# Altium PCB PCB_Project_Wavelength.PcbDoc
Units mil, origin at the board's own origin, x right, y up, seen from the top; angles counter-clockwise.
Board outline 3000 x 1980 mil, 2 copper layers (Top Layer, Bottom Layer); 53 components, 31 nets, 145 pads, 41 vias.
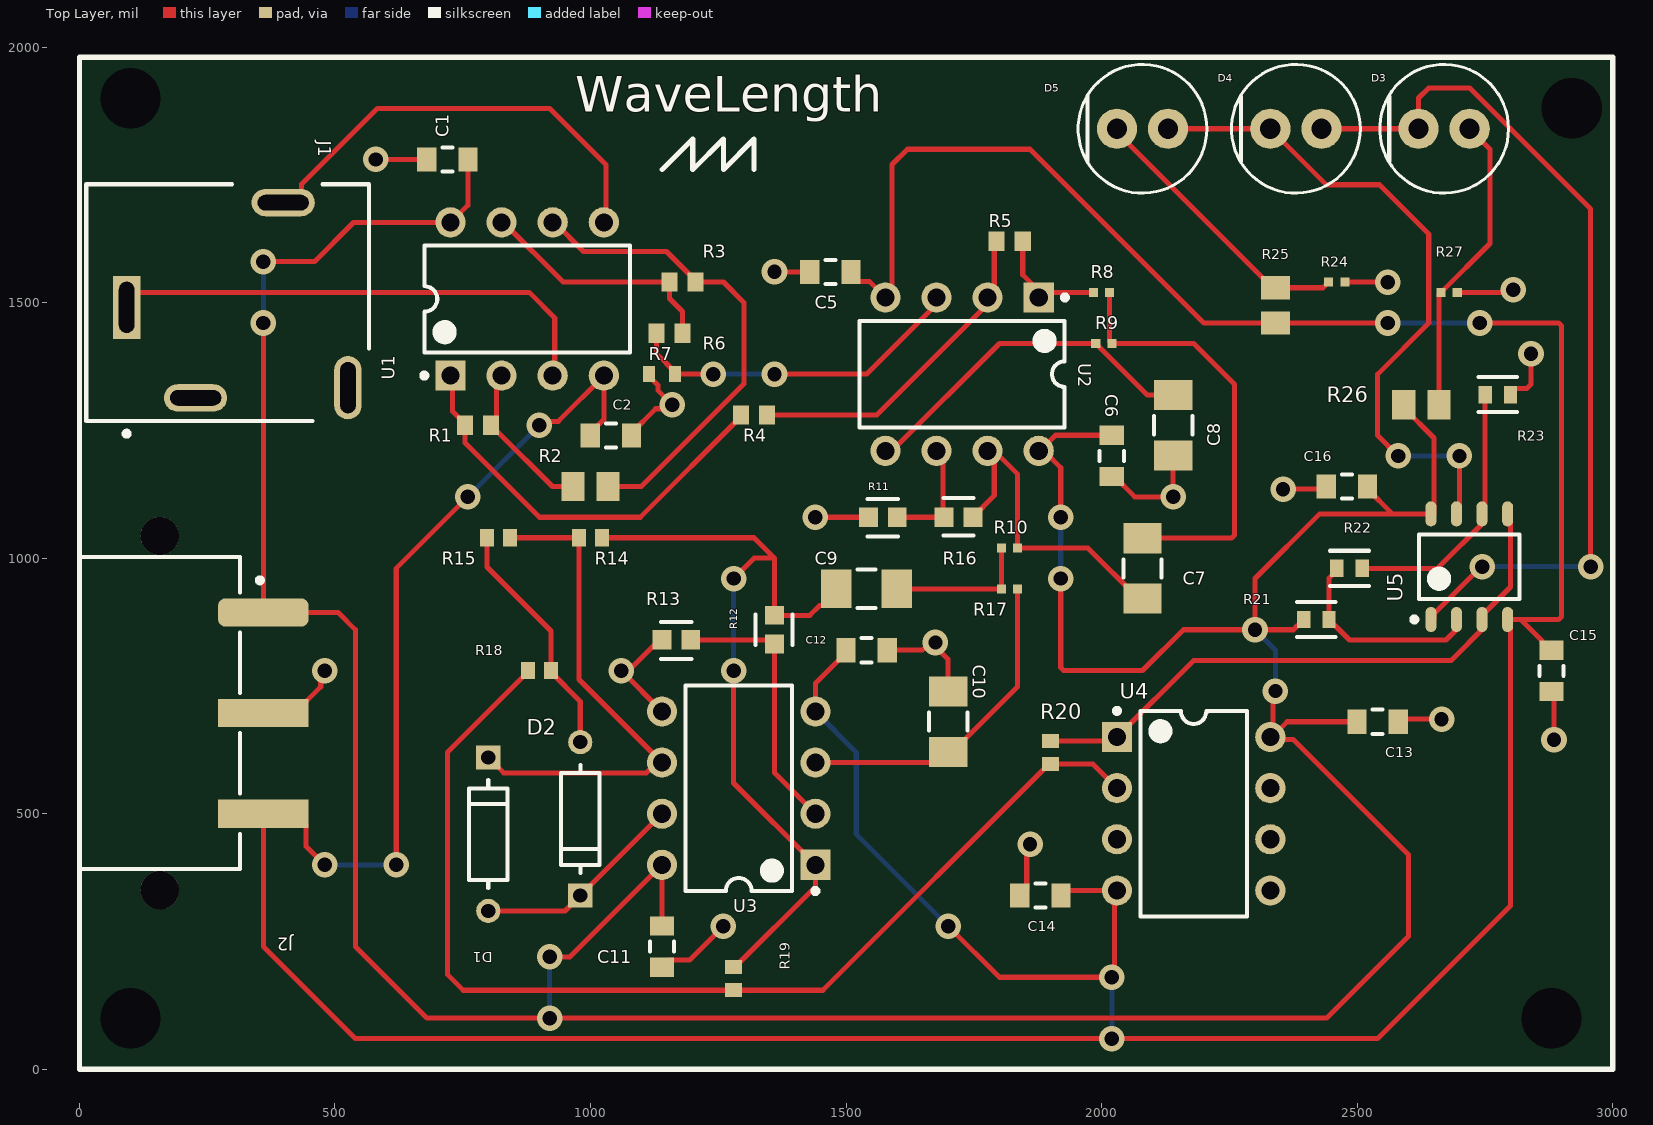
[diagram p0: Top Layer view]
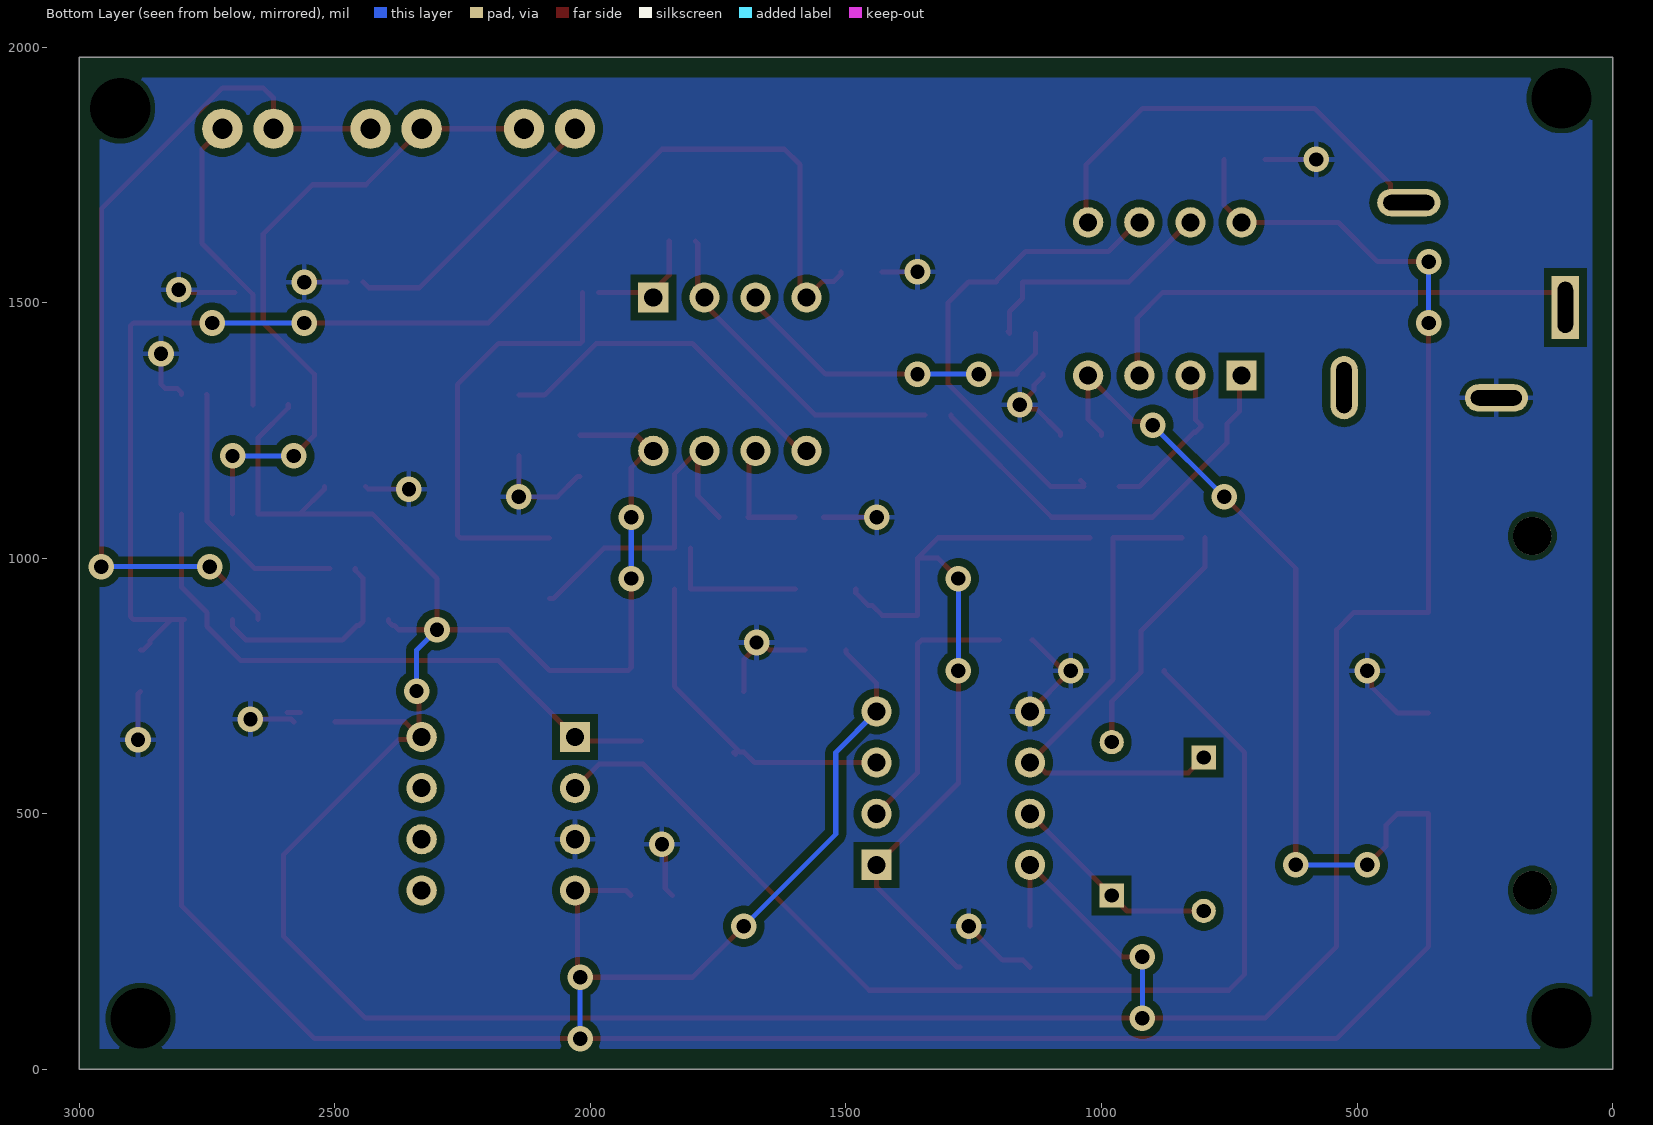
[diagram p1: Bottom Layer view, seen from below]
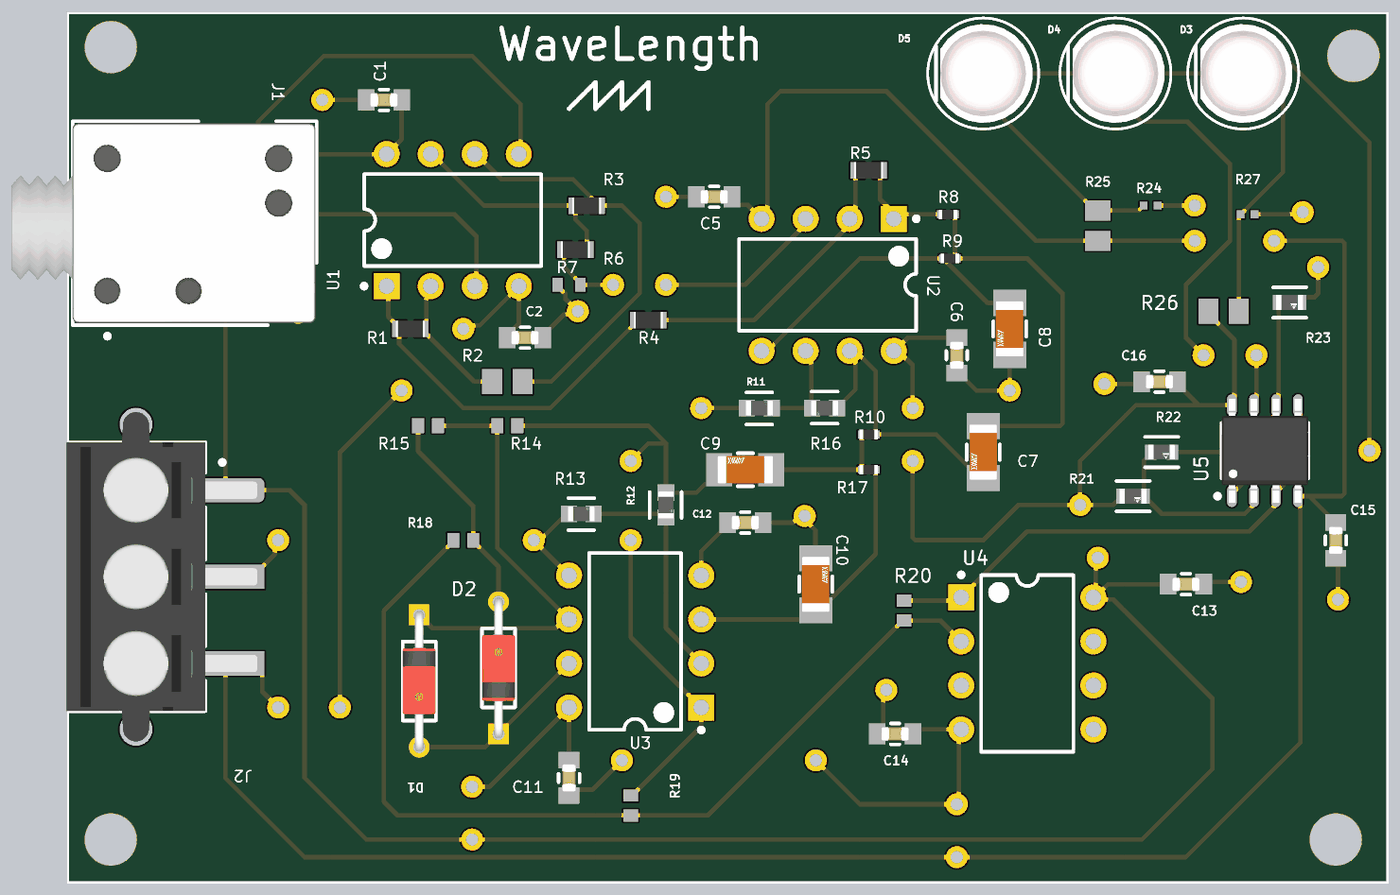
[diagram p2: 3D render of the assembled board from above, using the file's embedded part models]

## Layer stack, top to bottom
Top Solder: solder mask 0.4, Solder Resist, Dk 3.5
Top Layer: signal copper 1.4
Dielectric 1: dielectric 12.6, FR-4, Dk 4.8
Bottom Layer: signal copper 1.4
Bottom Solder: solder mask 0.4, Solder Resist, Dk 3.5

## Board outline
0,1980 0,0 3000,0 3000,1980

## Design rules (kind name [scope] priority, off if disabled: settings)
Clearance 1_1 [InNamedPolygon('GND')] p1: gap=10 ignorepadtopadclearanceinfootprint=FALSE except(15: Arc-Fill Arc-Poly Arc-Region Track-Fill Track-Poly Track-Region SMDPad-Fill SMDPad-Poly SMDPad-Region THPad-Fill THPad-Poly THPad-Region Via-Fill Via-Poly Via-Region)
Clearance 1 [InNamedPolygon('GND')] p2: gap=10 ignorepadtopadclearanceinfootprint=FALSE except(20: Arc-Fill Arc-Poly Arc-Region Track-Fill Track-Poly Track-Region SMDPad-Fill SMDPad-Poly SMDPad-Region THPad-Fill THPad-Poly THPad-Region Via-Fill Via-Poly Via-Region)
Clearance [All] p3: gap=10 ignorepadtopadclearanceinfootprint=FALSE ismatrix=TRUE
PolygonConnect [All] p1: connectstyle=Relief reliefconductorwidth=10 reliefentries=4 polygonreliefangle="90 Angle" airgapwidth=10
RoutingVias [All] p1: holewidth=28 width=50 viastyle="Through Hole" minholewidth=28 minwidth=50 maxholewidth=28 maxwidth=50
ShortCircuit [All] p1: allowed=TRUE
SolderMaskExpansion [All] p1: expansion=4 istentingtop=FALSE
UnRoutedNet [All] p1: checkbadconnections=TRUE
Width [All] p1: maxlimit=10 minlimit=10 preferedwidth=10
28 further rules are at their usual default settings.

## Components (designator, comment, footprint, x,y, rotation, side; value= is the part's Value field where it differs from the comment)
C1 "100nF" FP-CGA3E-0_3-0_1-IPC_A 720,1780 r180 top
C2 "100nF" FP-CGA3E-0_3-0_1-IPC_A 1040,1240 r0 top
C5 "100nF" FP-CGA3E-0_3-0_1-IPC_A 1469.35,1560 r180 top
C6 "100nF" FP-CGA3E-0_3-0_1-IPC_A 2020,1200 r270 top
C7 "68nF" FP-1206-L_3_2_0_2-W_1_6_0-IPC_A 2080,980 r270 top
C8 "68nF" FP-1206-L_3_2_0_2-W_1_6_0-IPC_A 2140,1260 r270 top
C9 "68nF" FP-1206-L_3_2_0_2-W_1_6_0-IPC_A 1540,940 r180 top
C10 "68nF" FP-1206-L_3_2_0_2-W_1_6_0-IPC_A 1700,680 r90 top
C11 "100nF" FP-CGA3E-0_3-0_1-IPC_A 1140,240 r270 top
C12 "100nF" FP-CGA3E-0_3-0_1-IPC_A 1540,820 r0 top
C13 "100nF" FP-CGA3E-0_3-0_1-IPC_A 2540,680 r0 top
C14 "100nF" FP-CGA3E-0_3-0_1-IPC_A 1880,340 r180 top
C15 "100nF" FP-CGA3E-0_3-0_1-IPC_A 2880,779.65 r90 top
C16 "100nF" FP-CGA3E-0_3-0_1-IPC_A 2480,1140 r180 top
D1 "1N4148" FP-017AG-MFG 800,460 r270 top
D2 "1N4148" FP-017AG-MFG 980,489.88 r90 top
D3 "SFH 4550" FP-SFH_4550-MFG 2670,1840 r0 top
D4 "SFH 4550" FP-SFH_4550-MFG 2380,1840 r0 top
D5 "SFH 4550" FP-SFH_4550-MFG 2080,1840 r0 top
J1 "35RAPC3BH3" FP-35RAPC3BH3-MFG 220,1500 r0 top
J2 "691709710303" 691709710303 157.24,696.85 r270 top
R1 "10K" RESC1609X50X30NL8T20 780,1260 r180 top
R2 "220" RESC2013X70X40NL20T20 1000,1140 r180 top
R3 "10K" RESC1609X50X30NL8T20 1180,1540 r0 top
R4 "10K" RESC1609X50X30NL8T20 1320,1280 r180 top
R5 "10K" RESC1609X50X30NL8T20 1820,1620 r180 top
R6 "10K" RESC1609X50X30NL8T20 1154.41,1440 r0 top
R7 "2.2K" RESC1608X55X25LL10T15 1140,1360 r0 top
R8 "4.7K" RESC1005X40X25LL05T05 2000,1520 r0 top
R9 "4.7K" RESC1005X40X25LL05T05 2004.25,1420 r180 top
R10 "47K" FP-CRCW0603-e3-IPC_B 1720,1080 r180 top
R11 "47K" FP-CRCW0603-e3-IPC_B 1571.83,1080 r0 top
R12 "47K" FP-CRCW0603-e3-IPC_B 1360,860 r270 top
R13 "47K" FP-CRCW0603-e3-IPC_B 1167.9,840 r0 top
R14 "6.8K" RESC1609X50X30LL10T20 1000,1040 r180 top
R15 "6.8K" RESC1609X50X30LL10T20 820,1040 r180 top
R16 "4.7K" RESC1005X40X25LL05T05 1820,1020 r180 top
R17 "4.7K" RESC1005X40X25LL05T05 1820,940 r0 top
R18 "3.4K" RESC1609X50X30LL10T20 900,780 r180 top
R19 "6.8K" RESC1609X50X30LL10T20 1280,177.36 r270 top
R20 "6.8K" RESC1609X50X30LL10T20 1900,620 r90 top
R21 "10K" FP-MCT0603-IPC_C 2420,880 r0 top
R22 "10K" FP-MCT0603-IPC_C 2484.78,980 r0 top
R23 "10K" FP-MCT0603-IPC_C 2775.22,1320 r0 top
R24 "5.6K" RESC1005X40X25LL05T05 2460,1540 r180 top
R25 "4.7K" RESC2013X70X40NL20T20 2340,1494.45 r270 top
R26 "4.7K" RESC2013X70X40NL20T20 2625.55,1300 r0 top
R27 "5.6K" RESC1005X40X25LL05T05 2680,1520 r0 top
U1 "TL072CP" P0008A 876.05,1507.03 r90 top
U2 "TL072CP" P0008A 1726.88,1360 r270 top
U3 "TL072CP" P0008A 1290,550 r180 top
U4 "TL072CP" P0008A 2180,500 r0 top
U5 "LM393DT" STM-SO-8_D_L 2719.28,983.35 r90 top

## Footprints (in the part's own frame and the unit in brackets; to place one, negate y for a bottom-side part, rotate by r counter-clockwise, add the part's x,y. Pads: shape width x height; smd on the part's side, far side on the other; paste and mask are expansions set on the pad)
691709710303 [mm] "Horizontal Entry SMT with Pressure Clamp, pitch 5mm, 03p"
  rrect50% 1.4x4.5 smd: 1(-5,5.15)
  rect 1.4x4.5 smd: 2(0,5.15) 3(5,5.15)
  round 1.9 hole 1.9 unplated: M1(-8.8,0) M2(8.8,0)
  silkscreen extent -7.75,-4 7.75,5.1, body extent -9.5,-4 9.5,7, height 9.95
FP-017AG-MFG [mm]
  rect 1.2x1.2 hole 0.7 paste-2539.97 mask+0: 1(-3.813,0)
  round 1.2 hole 0.7 paste-2539.97 mask+0: 2(3.813,0)
  silkscreen extent -2.68,-0.95 2.68,0.95, body extent -4.51,-1.05 4.51,1.05, height 0.25
FP-35RAPC3BH3-MFG [mil]
  rect 53.62x123.62 hole 100 slot 30 at 0 deg paste-99999 mask+0: 1(-127.5,-9.5)
  rrect100% 123.62x53.62 hole 100 slot 30 at 90 deg paste-99999 mask+0: 2(178.77,195.5) 5(7.37,-186.41)
  rrect100% 53.62x123.62 hole 100 slot 30 at 0 deg paste-99999 mask+0: 4(305.5,-166.5)
  silkscreen extent -206,-261 347,232, body extent -351,-235 351,235, height 10
FP-1206-L_3_2_0_2-W_1_6_0-IPC_A [mil]
  rect 59.24x75.05 smd paste+0 mask+0: 1(-59.09,0) 2(59.09,0)
  silkscreen extent -18,-38 18,38, body extent -108,-57 108,57, height 10
FP-CGA3E-0_3-0_1-IPC_A [mm]
  rect 0.956x1.206 smd paste+0 mask+0: 1(-1.025,0) 2(1.025,0)
  silkscreen extent -0.25,-0.6 0.25,0.6, body extent -2,-1.1 2,1.1, height 0.25
FP-CRCW0603-e3-IPC_B [mil]
  rect 36.81x37.88 smd paste+0 mask+0: 1(-28.17,0) 2(28.17,0)
  silkscreen extent -30,-37 30,35, body extent -56,-29 56,29, height 10
FP-MCT0603-IPC_C [mil]
  rect 26.13x33.94 smd paste+0 mask+0: 1(-24.78,0) 2(24.78,0)
  silkscreen extent -38,-34 38,34, body extent -42,-23 42,23, height 10
FP-SFH_4550-MFG [mm]
  round 2 hole 1 paste-2539.97 mask+0: 1(-1.27,0) 2(1.27,0)
  silkscreen extent -3.2,-3.2 3.2,3.2, body extent -3.05,-3.05 3.05,3.05, height 0.25
P0008A [mm] "DIP, 8-Leads, Body 10.15x6.6mm, Pitch 2.54mm"
  rect 1.5x1.5 hole 0.9: 1(-3.81,3.81)
  round 1.5 hole 0.9: 2(-3.81,1.27) 3(-3.81,-1.27) 4(-3.81,-3.81) 5(3.81,-3.81) 6(3.81,-1.27) 7(3.81,1.27) 8(3.81,3.81)
  silkscreen extent -3.93,-5.1 2.65,5.23, body extent -3.95,-5.07 3.95,5.07, height 5.08
RESC1005X40X25LL05T05 [mm] "Chip Resistor, 2-Leads, Body 1.05x0.55mm, IPC High Density"
  rect 0.45x0.45 smd: 1(-0.4,0) 2(0.4,0)
  body extent -0.53,-0.28 0.53,0.28, height 0.4
RESC1608X55X25LL10T15 [mm] "Chip Resistor, 2-Leads, Body 1.60x0.80mm, IPC High Density"
  rect 0.6x0.8 smd: 1(-0.65,0) 2(0.65,0)
  body extent -0.85,-0.45 0.85,0.45, height 0.55
RESC1609X50X30LL10T20 [mm] "Chip Resistor, 2-Leads, Body 1.55x0.85mm, IPC High Density"
  rect 0.7x0.85 smd: 1(-0.575,0) 2(0.575,0)
  body extent -0.82,-0.48 0.82,0.48, height 0.5
RESC1609X50X30NL8T20 [mm] "Chip Resistor, 2-Leads, Body 1.65x0.95mm, IPC Medium Density"
  rect 0.8x0.95 smd: 1(-0.65,0) 2(0.65,0)
  body extent -0.82,-0.48 0.82,0.48, height 0.5
RESC2013X70X40NL20T20 [mm] "Chip Resistor, 2-Leads, Body 2.00x1.25mm, IPC Medium Density"
  rect 1.15x1.45 smd: 1(-0.875,0) 2(0.875,0)
  body extent -1.1,-0.72 1.1,0.72, height 0.7
STM-SO-8_D_L [mm] "SOIC, 8-Leads, Body 5x4mm, Pitch 1.27mm, IPC High Density"
  oval 1.25x0.55 smd: 1(-2.625,1.905) 2(-2.625,0.635) 3(-2.625,-0.635) 4(-2.625,-1.905) 5(2.625,-1.905) 6(2.625,-0.635) 7(2.625,0.635) 8(2.625,1.905)
  silkscreen extent -2.75,-2.5 1.6,2.85, body extent -3,-2.5 3,2.5, height 1.75

## Part data
C1 C2 C5 C6 C11 C12 C13 C14 C15 C16: library part CMP-2000-07546-2, "Cap Ceramic 100nF 50V X7R 10% Pad SMD 0603 +125°C Automotive T/R", Case Code (Imperial)=0603, Case Code (Metric)=1608, Dielectric=X7R, Max Operating Temperature=125°C, Min Operating Temperature=-55°C, Package Quantity=1, Ratings=AEC-Q200, Tolerance=10%, Voltage=50V, Capacitance=100nF, Case/Package=0603, Composition=Ceramic, Depth=0.8mm, Height=0.8mm, Lead Free="Lead Free", Length=1.6mm, Mount="Surface Mount", Packaging="Tape and Reel", Radiation Hardening=No, REACH SVHC="No SVHC", Termination=SMD/SMT, Thickness=0.035inch, Voltage Rating=50V, Voltage Rating (DC)=50V, Weight=7.1E-05oz, Width=0.8mm
C7 C8 C9 C10: library part CMP-04427-019044-1, "General Purpose Ceramic Capacitor, 1206, 68nF, 10%, X7R, 15%, 100V", Case Code (Imperial)=1206, Case Code (Metric)=3216, Dielectric=X7R, Max Operating Temperature=125°C, Min Operating Temperature=-55°C, Package Quantity=1, Tolerance=10%, Voltage=100V, Capacitance=68nF, Case/Package=1206, Construction=Flat, Depth=1.6mm, Dissipation Factor=2.5%, Height=0.94mm, Lead Free="Lead Free", Length=3.2mm, Mount="Surface Mount", Number of Pins=2, Packaging="Tape and Reel", Radiation Hardening=No, REACH SVHC="No SVHC", RoHS Compliant=Yes, Series=-, Termination=SMD/SMT, Thickness=0.037inch, Voltage Rating=100V, Voltage Rating (DC)=100V, Width=0.063inch
D1 D2: library part CMP-07163-000046-1, "DIODE GEN PURP 100V 200MA DO35", Average Rectified Current=200mA, Capacitance=4pF, Case/Package=DO-35, Current=4A, Forward Current=300mA, Forward Voltage=1V, Max Forward Surge Current (Ifsm)=1A, Max Operating Temperature=175°C, Max Power Dissipation=500mW, Max Repetitive Reverse Voltage (Vrrm)=100V, Max Reverse Current=5uA, Min Operating Temperature=-65°C, Package Quantity=2000, Contact Plating=Tin, Current Rating=200mA, Diameter=1.91mm, Element Configuration=Single, Height=4.56mm, Lead Free="Lead Free", Length=4.56mm, Max Reverse Voltage (DC)=100V, Max Surge Current=4A, Mount="Through Hole", Number of Pins=2, Output Current=200mA, Outside Diameter=1.85mm, Packaging=Bulk, Peak Non-Repetitive Surge Current=4A, Polarity=Standard, Power Dissipation=500mW, Radiation Hardening=No, REACH SVHC="No SVHC", Recovery Time=4ns, Reverse Recovery Time=4ns, Reverse Voltage=100V, Series=-, Voltage=100V, Voltage Rating (DC)=100V, Weight=0.01lb, Width=1.91mm
D3 D4 D5: library part CMP-62016-000011-1, "EMITTER IR 860NM 100MA RADIAL", Colour=Infrared, Forward Current=100mA, Forward Voltage=1.5V, Manufacturer="Osram Opto", Reverse Voltage=5V, Temperature="-40°C to +100°C", Temperature Range High=+100°C, Temperature Range Low=-40°C, Automotive=No, Category=Diode, ComponentLink2Description=Datasheet, ComponentLink2URL=https://dammedia.osram.info/media/resource/hires/osram-dam-5580407/SFH%204550_EN.pdf, Device Class L1=Optoelectronics, Device Class L2=LEDs, Device Class L3=unset, Digikey Description="EMITTER IR 860NM 100MA RADIAL", Lead Free=Yes, Led Orientation=Straight, Manufacturer Part Number="SFH 4550", Mouser Description="Infrared Emitters - High Power Infrared 850 nm HALF ANGLE +/-3DEG", Octopart=https://octopart.com/sfh+4550-osram+opto-55410894, Package="SFH 4550", Peak Emmision Wavelength=860nm, RoHS=TRUE, Viewing Angle=6°
J1: library part CMP-47983-000003-1, "CONN JACK STEREO 3.5MM R/A", Body Color=Black, Package Quantity=1, Voltage Rating=500V, Body Material=Brass, Color=Black, Contact Material="Copper Alloy", Contact Plating=Silver, Gender=Female, Housing Material=PBT, Lead Free="Lead Free", Mount="Through Hole", Number of Ports=1, Number of Positions=3, Number of Terminals/Pins=3, Orientation="Right Angle", Packaging=Bulk, RoHS Compliant=Yes, Series=35, Shielding=Unshielded, Termination=Solder
J2: library part CMP-1502-03336-2, "Battery connector", Color=Black, Current=6A, Flammability Rating="UL94 V-0", Max Operating Temperature=130°C, Min Operating Temperature=-40°C, Voltage=300V, Connector Type=Screw, Contact Material=Nickel, Contact Plating=Tin, Current Rating=6A, Height=10.2mm, Housing Material=Nylon, Lead Pitch=5mm, Length=15mm, Mount="Surface Mount", NexarPartId=34171770, Number of Contacts=3, Number of Levels=1, Number of Pins=3, Number of Positions=3, Number of Positions Per Level=3, Number of Rows=1, Packaging=Digi-Reel®, Pitch=5mm, Plating=Steel, REACH SVHC=Unknown, RoHS=Compliant, Termination=Screw, Voltage Rating=300V, Wire Gauge (Max)=30AWG, Wire Gauge (Min)=14AWG, Wire/Cable Gauge=30AWG
R1 R3 R4 R5 R6: library part CMP-1666-00005-4, "Chip Resistor, 10 KOhm, +/- 1%, 100 mW, -55 to 155 degC, 0603 (1608 Metric), RoHS, Tape and Reel", Manufacturer="Vishay Semiconductor", Max Operating Temperature="155 degC", Min Operating Temperature="-55 degC", Package Quantity=5000, Voltage Rating="75 V", ComponentLink1Description="Manufacturer URL", ComponentLink1URL=http://www.vishay.com/, ComponentLink2Description=Datasheet, ComponentLink2URL=https://datasheet.ciiva.com/11809/0900766b80d98afc-11809037.pdf, DatasheetVersion=06/2012, Height="0.45 mm", Length="1.55 mm", Mounting Technology="Surface Mount", PackageDescription="2-Pin Surface Mount Device, Body 1.575 x 0.85 mm", PackageReference=0603, Packaging="Tape and Reel", REACH SVHC=Unknown, RoHSCompliant=true
R2: library part CMP-2001-00044-1, Manufacturer=Panasonic, Part Number=ERJ6ENF2200V
R7: library part CMP-2000-06934-1, "Thick Film Resistor, 2.2 KOhm, 100 mW, 50 V, +/- 1%, -55 to 155 degC, 2-Pin SMD (0603), RoHS, Tape and Reel", Case Code - in=0603, Case Code - mm=1608, Manufacturer=Yageo, Operating Temperature Range=-55Cto+155C, Package Description="2-Pin Surface Mount Device, Body 1.6 x 0.8 mm", Power Rating=100mW, Resistance=2.2kOhms, Temperature Coefficient=100PPM/C, Tolerance=1%, Voltage Rating=50V, Datasheet URL=http://www.yageo.com/documents/recent/PYu-RC_Group_51_RoHS_L_7.pdf, Datasheet Version="Rev. 7, 05/2017", Manufacturer URL=http://www.yageo.com/, Mounting Technology=SurfaceMount, Package Reference=0603, Packaging=Reel, Product=ThickFilmResistorsGeneralPurpose, Series=RC, Termination Style=SMD/SMT
R8 R9 R16 R17: library part CMP-2002-01154-4, "Chip Resistor, 4.7 KOhm, +/- 1%, 0.1 W, -55 to 155 degC, 0402 (1005 Metric), RoHS, Tape and Reel", Case Code (Imperial)=0402, Case Code (Metric)=1005, Max Operating Temperature="155 degC", Min Operating Temperature="-55 degC", Package Quantity=1, PartNumber=ERJ-2RKF4701X, Power Rating="100 mW", Resistance="4.7 KOhm", Tolerance=1%, Voltage Rating="50 V", Case\/Package=0402, ComponentLink1Description="Manufacturer URL", ComponentLink1URL=http://www.panasonic.com/, ComponentLink2Description=Datasheet, ComponentLink2URL=http://industrial.panasonic.com/cdbs/www-data/pdf/RDA0000/AOA0000C86.pdf, DatasheetVersion=04/2015, Height="0.35 mm", Length="1 mm", Mount="Surface Mount", Mounting Technology="Surface Mount", PackageDescription="2-Pin Surface Mount Device, Body 1 x 0.5 mm", PackageReference=0402, Packaging="Cut Tape", Pins=2, Radiation Hardening=No, REACH SVHC=Yes, RoHSCompliant=true, Width="0.5 mm"
R10 R11 R12 R13: library part CMP-2000-03379-3, "RES SMD 47K OHM 1% 1/10W 0603", Case Code (Imperial)=0603, Case Code (Metric)=1608, Max Operating Temperature=155°C, Max Power Dissipation=100mW, Min Operating Temperature=-55°C, Package Quantity=5000, Resistance=47kR, Resistance Tolerance=1%, Resistor Type="Thick Film", Temperature Coefficient=100ppm/°C, Voltage Rating=75V, Case/Package=0603, Construction=Rectangular, Contact Plating=Tin, Depth=0.85mm, Features="Automotive AEC-Q200", Height=0.45mm, Lead Free="Lead Free", Length=1.55mm, Military Standard=Not, Mount="Surface Mount", Number of Terminations=2, Packaging="Tape and Reel", Power Rating=100mW, Radiation Hardening=No, RoHS Compliant=Yes, Series=CRCW, Size Code=0603, Technology="THICK FILM", Termination=SMD/SMT, Tolerance=1%, Voltage Rating (DC)=75V, Weight=7.1E-05oz, Width=0.85mm
R14 R15 R19 R20: library part CMP-2000-03550-1, Manufacturer="Vishay Dale", Part Number=CRCW06036K80FKEA
R18: library part CMP-2000-03303-1, Manufacturer="Vishay Dale", Part Number=CRCW06033K40FKEA
R21 R22 R23: library part CMP-02407-000418-1, "RES SMD 100 OHM 1% 1/8W 0603", Case Code (Imperial)=0603, Case Code (Metric)=1608, Max Operating Temperature=125°C, Max Power Dissipation=125mW, Min Operating Temperature=-55°C, Package Quantity=1, Power Rating=100mW, Resistance=10kR, Temperature Coefficient=50ppm/°C, Tolerance=1%, Voltage Rating=75V, Case/Package=0603, Composition="Thin Film", Contact Plating=Tin, Depth=0.85mm, Height=0.022inch, Lead Free="Lead Free", Length=1.55mm, Military Standard=Not, Mount="Surface Mount", Number of Terminations=2, Packaging="Tape and Reel", Radiation Hardening=No, Voltage Rating (DC)=75V, Width=0.8mm
R24 R27: library part CMP-2002-00121-1, Manufacturer="Vishay Dale", Part Number=CRCW04025K60FKED
R25 R26: library part CMP-2001-00550-5, "Chip Resistor, 4.7 KOhm, +/- 1%, 0.125 W, -55 to 155 degC, 0805 (2012 Metric), RoHS, Tape and Reel", Manufacturer=Panasonic, Max Operating Temperature="155 degC", Min Operating Temperature="-55 degC", Package Quantity=5000, Voltage Rating="150 V", ComponentLink1Description="Manufacturer URL", ComponentLink1URL=http://www.panasonic.com/, ComponentLink2Description=Datasheet, ComponentLink2URL=http://industrial.panasonic.com/cdbs/www-data/pdf/RDA0000/AOA0000C86.pdf, DatasheetVersion=04/2015, Height="0.6 mm", Length="2 mm", Mount="Surface Mount", Mounting Technology="Surface Mount", PackageDescription="2-Pin Surface Mount Device, Body 2 x 1.25 mm", PackageReference=0805, Packaging="Tape and Reel", Pins=2, REACH SVHC=Yes, RoHSCompliant=true
U1 U2 U3 U4: library part CMP-0017-00950-2, "Dual Low-Noise JFET-Input General-Purpose Operational Amplifier, 7 to 36 V, 0 to 70 degC, 8-pin DIP (P8), Pb-Free (RoHS)", Manufacturer="Texas Instruments", Rating=Catalog, Total Supply Voltage(Max)(+5V is 5, +/-5V is 10)=36, Total Supply Voltage(Min)(+5V is 5, +/-5V is 10)=7, CMRR(Min)(dB)=70, Code_JEDEC=MS-001, ComponentLink1Description="Manufacturer URL", ComponentLink1URL=http://www.ti.com/, ComponentLink2Description=Datasheet, ComponentLink2URL=http://www.ti.com/lit/ds/symlink/tl072.pdf, ComponentLink3Description="Package Specification", ComponentLink3URL=http://www.ti.com/litv/pdf/mpdi001b, DatasheetVersion=SLOS080J, Eco-Plan="Pb-Free (RoHS)", GBW(Typ)(MHz)=3, IIB(Max)(pA)=200, Iq per channel(Max)(mA)=2.5, Mounting Technology="Through Hole", Number of Channels=2, Offset Drift(Typ)(uV/C)=18, PackageDescription="8-Pin Plastic In-Line, Body 9.59 x 6.35 mm, Pitch 2.54 mm", PackageReference=P0008A, PackageVersion="4040082/E, 04/2010", PartNumber=TL072CP, Slew Rate(Typ)(V/us)=13, Sub Family="General Purpose Amplifier, High Supply Voltage Amplifier (>=30V)", Vio (25C)(Max)(mV)=10, Vn at 1kHz(Typ)(nV/rtHz)=18
U5: library part CMP-2000-06550-1, "Low-Power, Dual-Voltage Comparator, 2 to 36 V, 0 to 70 degC, 8-Pin SOIC (SO), RoHS, Tape and Reel", Current - Input Bias (Max)=0.25µA@5V, Current - Output (Typ)=18mA@5V, Current - Quiescent (Max)=2.5mA, Manufacturer=STMicroelectronics, Operating Temperature=0°C~70°C, Package / Case="8-SOIC(0.154\",3.90mmWidth)", Package Description="8-Pin Small Outline Integrated Circuit, Body 4.9 x 3.9 mm, Pitch 1.27 mm", Package Reference=SO-8, Standard Package=2,500, Supplier Device Package=8-SO, Voltage - Input Offset (Max)=5mV@30V, Voltage - Supply, Single/Dual (±)=2V~36V,±1V~18V, Category=IntegratedCircuits(ICs), Datasheet URL=http://www.st.com/content/ccc/resource/technical/document/datasheet/group1/b4/cc/cf/13/18/28/44/f5/CD00000465/files/CD00000465.pdf/jcr:content/translations/en.CD00000465.pdf, Datasheet Version="Rev. 15, 02/2016", EDA / CAD Models=DownloadfromAcceleratedDesigns, Family=Linear-Comparators, Manufacturer URL=http://www.st.com/, Mounting Technology=SurfaceMount, Mounting Type=SurfaceMount, Number of Elements=2, Online Catalog=Comparators-2elements, Other Names=497-1593-2, Other Related Documents=LM393ViewAllSpecificationsLM393ViewAllSpecifications, Output Type=CMOS,DTL,ECL,MOS,Open-Collector,TTL, Packaging=Tape&Reel(TR), Type=GeneralPurpose

## Free pads (board coordinates)
  round 60 hole 118.11: 1(2920,1880) 2(2880,100) 3(100,100) 4(100,1900)

## Via types
v1: diameter 50, hole 28, Top Layer to Bottom Layer, 41 vias

## Nets (pads, with @x,y where several pads share a name; then routed paths per layer and width w, separated by ;. In a path a pad name is that pad's centre, name@x,y a point inside that pad or via, vN(x,y) a via of type N, cw(c..) or ccw(c..) an arc to the next point about the centre after c; other vN are vias at no path point)
GND: C1.2 C2.2 C5.2 C6.2 C8.2 C10.2 C11.2 C12.2 C13.2 C14.2 C15.1 C16.2 J1.5 J2.2 R7.1 R11.1 R13.1 R23.2 R24.1 R27.2 U3.5 U4.3 | length 2129
  Top Layer w10: J2.2 421.02,696.85 472.35,748.17 472.35,772.35 v1(480,780) ; v1(580,1780) C1.2 ; C2.2 1080.35,1244.92 1127.78,1292.35 1152.35,1292.35 v1(1160,1300) 1131.72,1328.28 1131.72,1338.76 1114.41,1356.06 R7.1 ; R13.1@1135.8,840 1134.36,840 1082.01,787.65 1067.65,787.65 v1(1060,780) U3.5 ; C11.2 1153.82,213.47 1193.47,213.47 v1(1260,280) ; v1(1360,1560) C5.2 ; v1(1440,1080) R11.1 ; C12.2 1649.07,820 1664.07,835 v1(1674.89,835) 1674.89,826.81 1699.09,802.62 1699.09,740 C10.2 ; C14.2 1853.47,353.82 1853.47,433.47 v1(1860,440) ; C6.2 2024.92,1159.65 2064.57,1120 v1(2140,1120) C8.2 ; v1(2355,1135) 2434.65,1135 C16.2 ; R24.1 v1(2560,1540) ; C13.2@2567.31,697.96 C13.2@2593.4,697.96 ; C13.2 2585.46,685.11 v1(2665,685.11) ; R27.2 2800,1520 v1(2805,1525) ; R23.2 2800,1323.65 2808.07,1331.72 2831.72,1331.72 2840,1340 v1(2840,1400) ; C15.1 2885,734.29 v1(2885,645)
NetC7_1: C7.1 R8.2 R9.1 | length 852.4
  Top Layer w10: R8.2 2015.75,1424.25 R9.1 2180,1420 2260,1340 2260,1044.94 2254.14,1039.09 C7.1
NetC7_2: C7.2 R10.1 R16.1 U2.7 | length 641.6
  Top Layer w10: R10.1 1748.17,1080.53 1790,1122.37 1790,1210 1835.75,1164.25 R16.1 1973.01,1020 2072.1,920.91 C7.2
NetC8_1: C8.1 R9.2 U2.5 | length 678.8
  Top Layer w10: U2.5@1590,1210 1800,1420 R9.2 2089.42,1319.09 C8.1
NetC9_1: C9.1 R16.2 R17.1 | length 285.2
  Top Layer w10: C9.1 R17.1 R16.2
NetC9_2: C9.2 R12.1 R14.1 R19.1 U3.1 | length 1606.6
  Top Layer w10: R14.1 1320,1040 1360,1000 ; R19.1@1277.05,200 R19.1 1282.95,200 1440,357.05 U3.1 1280,560 v1(1280,780) ; v1(1280,960) 1320,1000 1360,1000 ; C9.2 1480.91,932.1 1456.3,907.48 1448.39,907.48 1429.08,888.16 R12.1 1360,1000
  Bottom Layer w10: v1(1280,780) v1(1280,960)
NetC10_1: C10.1 R17.2 U3.3 | length 654.6
  Top Layer w10: U3.3 1679.09,600 C10.1 1707.9,620.91 1835.75,748.76 R17.2 ; C10.1@1715.75,615.75 C10.1@1720,620
NetD1_1: D1.1 R14.2 R15.1 U3.6 | length 1002.9
  Top Layer w10: D1.1 830.12,580 1109.61,580 1129.61,600 U3.6 977.36,762.64 R14.2 R15.1
NetD1_2: D1.2 D2.1 U3.7 | length 418.9
  Top Layer w10: D1.2 950.12,309.88 D2.1 1140,499.76 U3.7
NetD2_2: D2.2 R15.2 R18.1 | length 475.7
  Top Layer w10: R15.2 797.36,982.64 922.64,857.36 R18.1 922.64,777.05 980,719.69 D2.2
NetD3_1: D3.1 D4.2 U5.1 | length 1749
  Top Layer w10: D4.2 D3.1 2620,1900 2640,1920 2720,1920 2956.65,1683.35 v1(2956.65,983.35) ; U5.1@2650,880 2650,891.22 2742.13,983.35 v1(2744.68,983.35)
  Bottom Layer w10: v1(2744.68,983.35) v1(2956.65,983.35)
NetD3_2: D3.2 R26.2 R27.1 | length 598
  Top Layer w10: R26.2 2660,1515.75 R27.1 2760,1615.75 2760,1800 D3.2
NetD4_1: D4.1 D5.2 U5.7 | length 1320.7
  Top Layer w10: D5.2 D4.1 2439.51,1730.49 2543.65,1730.49 2640,1634.14 2640,1460 2540,1360 2540,1240 v1(2580,1200) ; U5.7@2700,1086.69 v1(2700,1200)
  Bottom Layer w10: v1(2580,1200) v1(2700,1200)
NetD5_1: D5.1 R24.2 R25.1 | length 551.8
  Top Layer w10: D5.1 2030,1832.99 2334.09,1528.9 R25.1 2433.15,1528.9 R24.2
NetJ1_1: J1.1 U1.3 | length 974.9
  Top Layer w10: J1.1 92.5,1498.19 114.31,1520 880,1520 930,1470 U1.3@930,1370
NetJ1_2: J1.2 U1.5 | length 862.5
  Top Layer w10: J1.2 414.57,1695.5 434.72,1715.65 434.72,1731.45 583.27,1880 920,1880 1030,1770 U1.5@1030,1670
NetR1_1: R1.1 R2.2 U1.2 | length 318.1
  Top Layer w10: U1.2@830,1356.57 830,1343.29 816.34,1329.63 816.34,1270.75 R1.1 805.59,1257.05 816.34,1246.3 819.29,1246.3 925.59,1140 R2.2
NetR1_2: R1.2 R4.2 U1.1 | length 826
  Top Layer w10: U1.1@730,1356.57 730,1287.36 754.41,1262.95 R1.2 754.41,1225.59 900,1080 1097.36,1080 1294.41,1277.05 R4.2
NetR2_1: R2.1 R3.2 U1.6 | length 953.4
  Top Layer w10: U1.6@930,1656.57 986.57,1600 1148.54,1600 1205.59,1542.95 R3.2 1260,1540 1300,1500 1300,1340.71 1099.29,1140 R2.1 ; R2.1@1034.45,1145.66 R2.1@1040.68,1151.89
NetR3_1: R3.1 R6.2 U1.7 | length 487.9
  Top Layer w10: U1.7@830,1656.57 946.57,1540 R3.1 1154.41,1508.17 1180,1482.58 R6.2 R6.2@1183.23,1443.23
NetR4_1: R4.1 R5.2 U2.2 | length 651.5
  Top Layer w10: R4.1 1560,1280 1790,1510 1790,1615.59 R5.2
NetR5_1: R5.1 R8.1 U2.1 | length 226.8
  Top Layer w10: R5.1 1845.59,1554.41 1890,1510 1900,1520 R8.1
NetR6_1: R6.1 R7.2 U2.3 | length 681.8
  Top Layer w10: R6.1 1128.82,1400.71 1165.59,1363.94 R7.2 v1(1240,1360) ; v1(1360,1360) 1540,1360 U2.3@1690,1510
  Bottom Layer w10: v1(1240,1360) v1(1360,1360)
NetR10_2: R10.2 R11.2 U2.6 | length 222.6
  Top Layer w10: R11.2 R10.2 1690,1081.83 U2.6@1690,1210
NetR12_2: R12.2 R13.2 U3.2 | length 528.4
  Top Layer w10: R13.2@1200,840 1351.83,840 R12.2 1360,580 U3.2
NetR18_2: R18.2 R19.2 R20.1 U4.2 | length 2185.2
  Top Layer w10: R18.2 877.36,777.05 720,619.69 720,185.86 751.13,154.72 R19.2 1454.41,154.72 1897.05,597.36 R20.1 1982.64,597.36 U4.2
NetR20_2: R20.2 U4.1 U5.3 U5.5 | length 1183.8
  Top Layer w10: R20.2 2022.64,642.64 U4.1 2180,800 2683.78,800 2750,866.22 2750,880 2750,893.78 2800,943.78 U5.5@2800,1086.69
NetR21_2: R21.2 R22.1 U5.2 | length 405
  Top Layer w10: R22.1 2460,976.09 2444.78,960.87 R21.2 2444.78,876.09 2452.84,868.03 2456.75,868.03 2484.78,840 2673.78,840 2700,866.22 U5.2@2700,880
NetR22_2: R22.2 R23.1 U5.6 | length 526.2
  Top Layer w10: R22.2 2657.09,980 2750,1072.91 2750,1086.69 2750.22,1086.91 2750.22,1319.78 R23.1
VCC+: C1.1 C6.1 C11.1 C13.1 C16.1 J2.1 R21.1 R26.1 U1.8 U2.8 U3.8 U4.8 U5.8 | length 7610
  Top Layer w10: v1(360,1460) J2.1 506.3,893.7 540,860 540,240 680,100 v1(920,100) 2440,100 2600,260 2600,420 2374.53,645.47 U4.8@2334.53,645.47 ; v1(360,1580) 460,1580 536.57,1656.57 726.05,1656.57 760,1690.51 760,1779.65 C1.1 ; v1(920,220) 960,220 U3.8 C11.1 ; U2.8 1879.14,1210 1909.5,1240.35 C6.1 ; U2.8@1890,1207.03 1920,1177.03 v1(1920,1080) ; v1(1920,960) 1920,785.86 1925.86,780 2080,780 2160,860 v1(2300,860) ; v1(2340,740) 2335,735 2335,655 U4.8 2332.97,650 2362.97,680 C13.1 ; R21.1 2395.22,876.09 2387.16,868.03 2383.25,868.03 2375.22,860 v1(2300,860) ; C16.1 2520.35,1135.08 2568.74,1086.69 ; R26.1 2591.1,1294.09 2650,1235.2 2650,1086.69 U5.8 2568.74,1086.69 ; v1(2300,860) 2300,960 2426.69,1086.69 2568.74,1086.69
  Bottom Layer w10: v1(360,1460) v1(360,1580) ; v1(920,100) v1(920,220) ; v1(1920,960) v1(1920,1080) ; v1(2300,860) 2340,820 v1(2340,740)
VCC-: C2.1 C5.1 C12.1 C14.1 C15.2 J2.3 R25.2 U1.4 U2.4 U3.4 U4.4 U5.4 | length 9065.7
  Top Layer w10: v1(480,400) 443.58,436.42 443.58,477.44 421.02,500 J2.3 360,240 540,60 v1(2020,60) 2540,60 2800,320 U5.4@2800,880 ; v1(620,400) 620,980 v1(760,1120) ; v1(900,1260) 907.65,1267.65 937.14,1267.65 U1.4@1026.05,1356.57 ; C2.1 999.65,1244.92 1026.05,1271.33 U1.4@1026.05,1356.57 ; U1.4 U1.4@1026.05,1356.57 ; U3.4 1440,755.43 1499.65,815.08 C12.1 ; C5.1 1509.7,1555.31 1523.53,1541.49 1545.39,1541.49 U2.4 ; U2.4@1590,1510 1590,1770 1620,1800 1860,1800 2200,1460 R25.2 v1(2560,1460) ; v1(1700,280) 1800,180 v1(2020,180) 2025,185 U4.4@2025,345 ; C14.1 1930.35,350 U4.4 U4.4@2025,345 ; U4.4@2020.91,340.91 U4.4@2025,345 ; v1(2740,1460) 2894.14,1460 2900,1454.14 2900,885.86 2894.14,880 2820,880 ; U5.4 U5.4@2800,880 ; C15.2 2875.08,820 2861.26,833.82 2861.26,838.74 2820,880 ; U5.4@2800,880 2820,880
  Bottom Layer w10: v1(480,400) v1(620,400) ; v1(760,1120) v1(900,1260) ; U3.4 1520,620 1520,460 v1(1700,280) ; v1(2020,60) v1(2020,180) ; v1(2560,1460) v1(2740,1460)
pads on no net: J1.4 J2.M1 J2.M2 U4.5 U4.6 U4.7

## Polygon pours and split planes (outlines as drawn)
GND on Bottom Layer "GND" (solid, pour order 0): 40,1940 2960,1940 2960,40 40,40

## Silkscreen, mask and mechanical layers (free items; w line width, h text height)
Top Overlay:
  lines w10: 1140,1760 1200,1820 1200,1760 1260,1820 1260,1760 1320,1820 1320,1760 ; 0,0 3000,0 3000,580 3000,1960 3000,1980 0,1980 0,0
  text "WaveLength" at 970,1873.33 h70